# Altium PCB gprs1.PcbDoc (part 2 of 2)
Units mil, origin at the board's own origin, x right, y up, seen from the top; angles counter-clockwise.
Board outline 5204.72 x 2838.58 mil, 2 copper layers (Top Layer, Bottom Layer); 114 components, 66 nets, 333 pads, 440 vias.
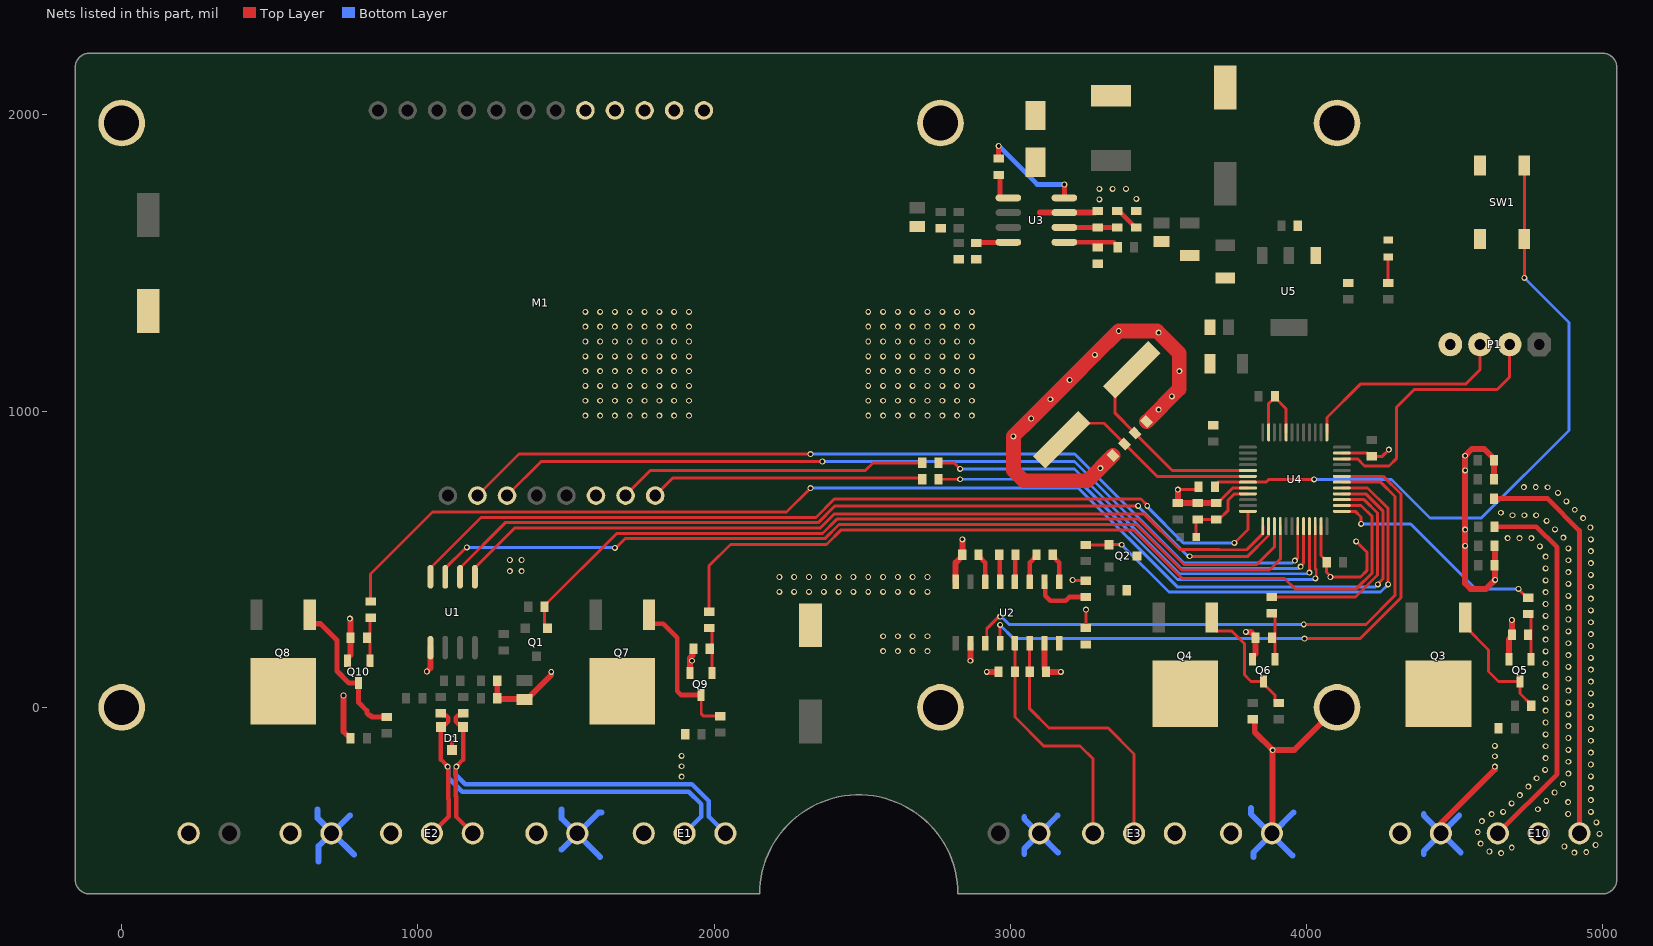
[diagram p2: the nets of this part, all layers, seen from the top]

## Via types
v1: diameter 20, hole 12, Top Layer to Bottom Layer, tented both sides, 334 vias
v2: diameter 20, hole 12, Top Layer to Bottom Layer, 106 vias

## Nets (pads, with @x,y where several pads share a name; then routed paths per layer and width w, separated by ;. In a path a pad name is that pad's centre, name@x,y a point inside that pad or via, vN(x,y) a via of type N, cw(c..) or ccw(c..) an arc to the next point about the centre after c; other vN are vias at no path point) (continued)
GND: C1.1 C2.1 C5.2 C6.2 C7.1 C8.1 C9.1 C11.2 C12.1 C13.1 C14.2 C15.1 C16.1 C17.1 C19.1 C20.1 C21.1 C22.1 C23.1 C24.1 C25.1 C26.1 C27.1 C28.1 C29.2 C30.1 C31.1 C32.1 C33.1 C34.1 C35.1 C36.1 C37.1 C38.1 C39.1 C40.1 C41.1 D1.3 D2.1 DS1.2 E1.A3 E2.A3 E3.A1 E4.A1 E5.A1 E6.A1 E7.A1 E8.A1 E9.A2 E10.A2 H1.1 H2.1 H3.1 H4.1 H5.1 H6.1 M1.6 M1.16 M1.17 M1.18 M1.19 M1.20 P1.4 Q5.2 Q6.2 Q9.2 Q10.2 R7.2 R15.2 R16.2 R24.2 R25.2 R28.2 R29.2 R30.2 R33.1 R34.1 SW1.1 SW1.2 U1.5 U2.8 U2.10 U2.15 U3.7 U4.8 U4.23 U4.35 U4.44 U4.47 U5.1 | length 8325.4
  Top Layer w10: v1(3210,430) 3211.22,428.78 3253.78,428.78 C5.2@3255,427.56 ; C9.1@3255,267.56 v1(3255,330) ; v1(3565,735) 3626.25,735 3635.03,743.78 C26.1@3635.03,745 ; C37.1@3695,689.29 3698.94,689.29 3750.12,740.47 U4.8@3801.54,740.47 ; U4.47@3871.42,928.46 3871.42,1024.92 C33.1@3892.56,1046.06 ; C33.1@3892.56,1050 C33.1@3892.56,1046.06 ; U4.44@3930.47,928.46 3930.47,1008.15 C33.1@3892.56,1046.06 ; U4.23@4048.58,611.54 4048.58,512.8 4067.44,493.94 C31.1@4067.44,490 4067.44,455.27 4080,442.71 v1(4080,440) 4181.56,440 4203,461.44 4203,524.02 v1(4167.02,560) ; U4.35@4118.46,858.58 4204.92,858.58 4216.06,847.44 C34.1@4220,847.44 4255,847.44 v1(4277.56,870)
  Top Layer w15: D1.3@1115,-144.37 v1(1115,-105)
  Top Layer w20: v1(748.66,40) 748.66,-81.22 C41.1@772.44,-105 ; Q10.2@762.6,157.4 762.6,166.26 772.44,176.1 R25.2@772.44,235 772.44,297.4 v1(770,299.84) ; v1(1030,121.08) 1042.09,133.17 U1.5@1042.09,201.73 ; C2.1@1267.56,90 R7.2@1267.56,30 1269.06,28.5 1358.5,28.5 C1.1@1360,27.01 1367.87,27.01 1450,109.13 v1(1450,120) ; Q9.2@1917.6,116.16 1917.6,166.83 1926.22,175.45 1926.22,194.55 R24.2@1930,198.33 ; U2.8@2815,423.35 2815,488.62 2837.44,511.06 C6.2@2837.44,515 v1(2837.44,566.75) ; v1(2865,157.4) U2.10@2865,216.65 ; v1(2920,120) C8.1@2959.88,120 ; 3100,1670 U3.7@3182.05,1670 3285.94,1670 3291.06,1675.12 C19.1@3295,1675.12 ; U2.15@3115,230.43 U2.15@3115,216.65 3115,129.06 3120.12,123.94 C7.1@3120.12,120 v1(3170,120) ; v1(3565,735) C35.1@3565,689.29 C36.1@3631.85,689.29 C37.1@3695,689.29 ; v1(3795,255) 3811.38,255 3827.44,238.94 R16.2@3827.44,235 3827.44,181.1 3817.6,171.26 Q6.2@3817.6,162.4 ; C39.1@3817.6,-40.04 3820.97,-40.04 3824.75,-43.82 3824.75,-83.82 v1(3885,-144.07) ; E5.A1@3882.8,-425 3885,-422.8 v1(3885,-144.07) ; H4.1@4102.36,0 3958.29,-144.07 v1(3885,-144.07) ; E4.A1@4452.8,-425 4452.8,-392.2 4635,-210 v1(4635,-200) ; C25.1@4632.5,769.76 R34.1@4632.5,834.76 4632.5,838.7 4599.2,872 4557.67,872 v1(4535,849.33) 4535,418.13 4553.13,400 4605.41,400 v1(4635.97,430.56) 4635.97,543.02 R33.1@4634,545 ; Q5.2@4682.6,162.4 4682.6,231.22 4692.44,241.06 R15.2@4692.44,245 v1(4692.44,295)
  Top Layer w50: C28.1@3346.29,850.51 3260.78,765 3045,765 3010,800 v1(3010,915) v1(3070,975) v1(3135,1040) v1(3200,1105) v1(3285,1190) v1(3365.44,1270.44) 3494.56,1270.44 v1(3500,1265) 3570,1195 v1(3570,1135) 3570,1075 C27.1@3459.49,964.49
  Bottom Layer w20: 661.61,-345 661.61,-374.23 E7.A1@710.09,-422.7 ; 665,-520 665,-467.8 E7.A1@707.8,-425 E7.A1@710.09,-422.7 ; 770,-365 E7.A1@711.19,-423.81 ; 785,-497.61 E7.A1@711.19,-423.81 ; 1485,-480 E6.A1@1537.5,-427.5 ; 1485,-345 1485,-375 E6.A1@1537.5,-427.5 ; 1615,-505 E6.A1@1537.5,-427.5 ; 1620,-355 1610,-355 E6.A1@1537.5,-427.5 ; 3046.59,-495 3046.59,-477.15 E8.A1@3096.87,-426.87 ; 3046.59,-370 3046.59,-376.59 E8.A1@3096.87,-426.87 ; 3158.74,-365 E8.A1@3096.87,-426.87 ; 3160,-490 E8.A1@3096.87,-426.87 ; 3811.52,-340 3811.52,-359.92 3879.7,-428.1 E5.A1@3880.8,-429.2 ; 3820,-505 3820,-490 E5.A1@3880.8,-429.2 ; E5.A1@3882.8,-425 E5.A1@3885,-425 ; 3951.6,-500 E5.A1@3880.8,-429.2 ; 3955,-355 E5.A1@3885,-425 ; 4395,-495 4395,-485 E4.A1@4455,-425 ; 4395,-360 4395,-365 E4.A1@4455,-425 ; 4515,-365 E4.A1@4455,-425 ; 4520,-490 E4.A1@4455,-425 ; E7.A1@710.09,-422.7 E7.A1@711.19,-423.81 ; E5.A1@3880.8,-429.2 E5.A1@3885,-425
  other v1: 1890,-233.64 1890,-198.64 4635,-165 1890,-163.64 4635,-130 1925,157.4 2570,190 2620,190 2670,190 2720,190 2570,240 2620,240 2670,240 2720,240 2220,390 2270,390 2320,390 2370,390 2420,390 2470,390 2520,390 2570,390 2620,390 2670,390 2720,390 2220,440 2270,440 2320,440 2370,440 2420,440 2470,440 2520,440 2570,440 2620,440 2670,440 2720,440 1310,460 1350,460 1310,497.5 1350,497.5 4535,545 4535,600 4535,800 3303.54,807.76 1565,985 1615,985 1665,985 1715,985 1765,985 1815,985 1865,985 1915,985 2520,985 2570,985 2620,985 2670,985 2720,985 2770,985 2820,985 2870,985 3500,1005 1565,1035 1615,1035 1665,1035 1715,1035 1765,1035 1815,1035 1865,1035 1915,1035 2520,1035 2570,1035 2620,1035 2670,1035 2720,1035 2770,1035 2820,1035 2870,1035 3545,1050 1565,1085 1615,1085 1665,1085 1715,1085 1765,1085 1815,1085 1865,1085 1915,1085 2520,1085 2570,1085 2620,1085 2670,1085 2720,1085 2770,1085 2820,1085 2870,1085 1565,1135 1615,1135 1665,1135 1715,1135 1765,1135 1815,1135 1865,1135 1915,1135 2520,1135 2570,1135 2620,1135 2670,1135 2720,1135 2770,1135 2820,1135 2870,1135 1565,1185 1615,1185 1665,1185 1715,1185 1765,1185 1815,1185 1865,1185 1915,1185 2520,1185 2570,1185 2620,1185 2670,1185 2720,1185 2770,1185 2820,1185 2870,1185 1565,1235 1615,1235 1665,1235 1715,1235 1765,1235 1815,1235 1865,1235 1915,1235 2520,1235 2570,1235 2620,1235 2670,1235 2720,1235 2770,1235 2820,1235 2870,1235 1565,1285 1615,1285 1665,1285 1715,1285 1765,1285 1815,1285 1865,1285 1915,1285 2520,1285 2570,1285 2620,1285 2670,1285 2720,1285 2770,1285 2820,1285 2870,1285 1565,1335 1615,1335 1665,1335 1715,1335 1765,1335 1815,1335 1865,1335 1915,1335 2520,1335 2570,1335 2620,1335 2670,1335 2720,1335 2770,1335 2820,1335 2870,1335 3300,1715 3425,1716.2 3300,1750 3345,1750 3390.12,1750
  other v2: 4656.52,-491.73 4903.58,-490.56 4943.54,-488.73 4616.85,-486.58 4692.17,-473.6 4869.52,-469.59 4975.47,-464.63 4586.99,-459.97 4988.31,-426.75 4577.28,-421.16 4977.56,-388.22 4591.38,-383.73 4623.96,-360.52 4882.18,-359.99 4663.15,-352.52 4959.01,-352.79 4780.38,-343.95 4691.44,-324.24 4882.18,-319.99 4808.67,-315.66 4959.01,-312.79 4719.72,-295.95 4836.95,-287.38 4959.01,-272.79 4748.01,-267.67 4865.24,-259.09 4776.29,-239.38 4959.01,-232.79 4883.42,-223.46 4804.57,-211.1 4959.01,-192.79 4883.42,-183.46 4806.58,-171.15 4959.01,-152.79 4883.42,-143.46 4806.58,-131.15 4959.01,-112.79 4883.42,-103.46 4806.58,-91.15 4959.01,-72.79 4883.42,-63.46 4806.58,-51.15 4959.01,-32.79 4883.42,-23.46 4806.58,-11.15 4959.01,7.21 4883.42,16.54 4806.58,28.85 4959.01,47.21 4883.42,56.54 4806.58,68.85 4959.01,87.21 4883.42,96.54 4806.58,108.85 4959.01,127.21 4883.42,136.54 4806.58,148.85 4959.01,167.21 4883.42,176.54 4806.58,188.85 4959.01,207.21 4883.42,216.54 4806.58,228.85 4959.01,247.21 4883.42,256.54 4806.58,268.85 4959.01,287.21 4883.42,296.54 4806.58,308.85 4959.01,327.21 4883.42,336.54 4806.58,348.85 4959.01,367.21 4883.42,376.54 4806.58,388.85 4959.01,407.21 4883.42,416.54 4806.58,428.85 4959.01,447.21 4883.42,456.54 4806.58,468.85 4959.01,487.21 4883.42,496.54 4806.58,508.85 4959.01,527.21 4883.42,536.54 4786.84,543.64 4959.01,567.21 4678.22,571.58 4718.22,571.58 4758.22,571.58 4866.4,572.74 4838.11,601.02 4957.41,607.18 4809.83,629.3 4933.03,638.89 4694.69,648.42 4734.69,648.42 4774.69,648.42 4655.61,656.94 4904.75,667.18 4876.46,695.46 4848.18,723.75 4733.19,743.18 4773.19,743.18 4813.19,743.13
GPRS_GPIO1: M1.2 U4.19 | length 3093.3
  Top Layer w10: M1.2@1200.83,715 1340.83,855 v1(2325,855) ; v1(3959.8,495.2) 3969.84,505.24 U4.19@3969.84,611.54
  Bottom Layer w10: v1(2325,855) 3216.82,855 3584.82,487 3951.6,487 v1(3959.8,495.2)
GPRS_GPIO2: M1.3 U4.20 | length 3018.8
  Top Layer w10: M1.3@1300.83,715 1415.83,830 v1(2365,830) ; v1(3979.6,475.4) 3989.53,485.33 U4.20@3989.53,611.54
  Bottom Layer w10: v1(2365,830) 3216.37,830 3577.37,469 3973.2,469 v1(3979.6,475.4)
GPRS_RXD: M1.7 R12.1 | length 1047.7
  Top Layer w10: M1.7@1700.83,715 1700.83,715.83 1785,800 2510.96,800 2535.96,825 R12.1@2702.44,825
GPRS_TXD: M1.8 R17.1 | length 928.8
  Top Layer w10: M1.8@1800.83,715 1860.83,775 2696.86,775 R17.1@2702.44,769.42
NetC3_1: C3.1 U2.1 | length 100.9
  Top Layer w16: C3.1@3142.56,515 3142.56,511.06 3165,488.62 U2.1@3165,423.35
NetC3_2: C3.2 U2.3 | length 100.9
  Top Layer w16: U2.3@3065,423.35 3065,488.62 3087.44,511.06 C3.2@3087.44,515
NetC4_1: C4.1 U2.5 | length 92.7
  Top Layer w16: C4.1@2962.44,515 2963.72,513.72 2963.72,424.63 U2.5@2965,423.35
NetC4_2: C4.2 U2.4 | length 92.7
  Top Layer w16: U2.4@3015,423.35 3016.28,424.63 3016.28,513.72 C4.2@3017.56,515
NetC5_1: C5.1 U2.2 | length 196.8
  Top Layer w16: U2.2@3115,423.35 3117.83,420.52 3117.83,377.17 3135,360 3186.81,360 3199.25,372.44 C5.1@3255,372.44
NetC6_1: C6.1 U2.6 | length 100.9
  Top Layer w16: C6.1@2892.56,515 2892.56,511.06 2915,488.62 U2.6@2915,423.35
NetC7_2: C7.2 E3.A2 U2.14 | length 904.7
  Top Layer w10: U2.14@3065,216.65 C7.2@3065,120 3065,-5 3130,-70 3330,-70 3417.2,-157.2 E3.A2@3417.2,-425
NetC8_2: C8.2 E3.A3 U2.13 | length 823
  Top Layer w10: U2.13@3015,216.65 C8.2@3015,120 3015,-32.56 3112.44,-130 3235,-130 3279.41,-174.41 E3.A3@3279.41,-425
NetC10_1: C10.1 U3.1 | length 105.6
  Top Layer w16: C10.1@2960,1797.44 2964.79,1792.65 2964.79,1723.52 2968.31,1720 U3.1@2993.07,1720
NetC10_2: C10.2 D2.2 L1.1 U3.8 | length 363.3
  Top Layer w16: C10.2@2960,1852.56 v1(2960,1895) ; U3.8@3182.05,1720 v1(3182.05,1765)
  Bottom Layer w16: v1(2960,1895) 3090,1765 v1(3182.05,1765)
NetC15_2: C15.2 U3.4 | length 109.1
  Top Layer w16: C15.2@2885,1567.56 2886.22,1568.78 2991.85,1568.78 U3.4@2993.07,1570
NetC18_1: C18.1 R30.1 | length 87.8
  Top Layer w16: C18.1@3360,1675.12 3365.78,1669.34 3371.72,1669.34 3421.06,1620 R30.1@3425,1620
NetC18_2: C18.2 C19.2 U3.6 | length 178
  Top Layer w16: U3.6@3182.05,1620 C19.2@3295,1620 C18.2@3360,1620
NetC26_2: C26.2 SW1.3 SW1.4 U4.7 | length 2339.7
  Top Layer w10: C26.2@3690.15,745 3690.15,748.94 3701.37,760.16 U4.7@3801.54,760.16 3862.45,760.16 3871.72,769.42 v1(4025,769.42) ; v1(4734.8,1449.76) SW1.4@4734.8,1580.98 SW1.3@4734.8,1829.02
  Bottom Layer w10: v1(4025,769.42) 4285.91,769.42 4415.84,639.5 4589.53,639.5 4885,934.97 4885,1299.57 v1(4734.8,1449.76)
NetC36_2: C36.2 C37.2 FB1.2 U4.9 | length 292.1
  Top Layer w10: FB1.2@3626.57,575 3626.57,628.9 C36.2@3631.85,634.17 3691.57,634.17 3704.17,634.17 3735,665 3735,699.76 3756.02,720.79 U4.9@3801.54,720.79 ; C37.2@3691.57,630.75 C37.2@3695,634.17
NetDS1_1: DS1.1 R35.1 | length 87.4
  Top Layer w10: R35.1@4275,1432.56 DS1.1@4275,1520
NetE4_A2: E4.A2 Q3.3
NetE5_A2: E5.A2 Q4.3
NetE6_A2: E6.A2 Q7.3
NetE7_A2: E7.A2 Q8.3
NetE10_A1: E10.A1 R32.2 | length 1354.7
  Top Layer w16: R32.2@4632.5,704.76 4812.83,704.76 4920.59,597.01 E10.A1@4920.59,-425
NetE10_A3: E10.A3 R31.2 | length 1287.7
  Top Layer w16: R31.2@4634,610 4774.8,610 4845,539.8 4845,-225 E10.A3@4645,-425
NetQ3_1: Q3.1 Q5.3 R10.2 | length 433.3
  Top Layer w10: Q3.1@4535,303.39 4535,273.07 4614,194.08 4614,121 4647.4,87.6 Q5.3@4720,87.6 4720,46.9 4757.96,8.94 R10.2@4757.96,5
NetQ4_1: Q4.1 Q6.3 R11.2 | length 439.2
  Top Layer w10: Q4.1@3680,303.39 3680,273.07 3695.87,257.2 3747.84,257.2 3790,215.04 3790,110 3812.4,87.6 Q6.3@3855,87.6 3855,78.74 3892.28,41.46 3892.28,23.85 3901.06,15.07 R11.2@3905,15.07
NetQ5_1: Q5.1 R13.2 R15.1 | length 157.3
  Top Layer w10: R13.2@4747.56,315 4748.62,315 4757.4,306.22 Q5.1@4757.4,162.4
NetQ6_1: Q6.1 R14.2 R16.1 | length 159.5
  Top Layer w10: R14.2@3882.8,317.44 3883.62,317.44 3892.4,308.66 Q6.1@3892.4,162.4
NetQ7_1: Q7.1 Q9.3 R18.2 | length 511.1
  Top Layer w10: Q9.3@1955,41.36 1956.28,40.08 1956.28,-22.36 1957.56,-23.64 1963.76,-29.84 R18.2@2020,-29.84
  Top Layer w16: Q7.1@1780.16,282.27 1827.73,282.27 1875,235 1875,55.08 1888.72,41.36 Q9.3@1955,41.36
NetQ8_1: Q8.1 Q10.3 R19.2 | length 494.5
  Top Layer w17: Q8.1@635.16,282.27 670.83,282.27 726.5,226.59 726.5,122.57 766.47,82.6 Q10.3@800,82.6 800,16.5 827.56,-11.06 827.56,-15 827.56,-18.94 836.34,-27.72 840.28,-27.72 845,-32.44 R19.2@895,-32.44
NetQ9_1: Q9.1 R22.2 R24.1 | length 156
  Top Layer w10: R22.2@1982.56,267.44 1983.62,267.44 1992.4,258.66 Q9.1@1992.4,116.16
NetQ10_1: Q10.1 R23.2 R25.1 | length 146.1
  Top Layer w10: Q10.1@837.4,157.4 837.4,299.84 R23.2@840,302.44
NetR27_2: R27.2 R29.1 U3.5 | length 189.9
  Top Layer w16: U3.5@3182.05,1570 3348.94,1570 3362.44,1556.5 R27.2@3362.44,1552.56
OSCIN: C27.2 U4.5 X1.1 | length 698.6
  Top Layer w10: X1.1@3409.06,1140 3353.38,1084.32 3353.38,992.65 C27.2@3420.51,925.51 3546.5,799.53 U4.5@3801.54,799.53
OSCOUT: C28.2 U4.6 X1.2 | length 726.4
  Top Layer w10: X1.2@3172.42,903.37 3228.1,959.05 3315.71,959.05 C28.2@3385.27,889.49 3494.91,779.84 U4.6@3801.54,779.84
POWSW_1: R13.1 U4.25 | length 764.3
  Top Layer w10: U4.25@4118.46,661.73 4164.27,661.73 4183.58,642.42 v1(4183.58,619.12) ; v1(4715,400) 4715,398.74 4743.62,370.12 R13.1@4747.56,370.12
  Bottom Layer w10: v1(4183.58,619.12) 4350.88,619.12 4570,400 v1(4715,400)
POWSW_2: R22.1 U4.26 | length 2856.9
  Top Layer w10: R22.1@1982.56,322.56 1982.56,477.75 2054.81,550 2379.36,550 2428.65,599.29 3415.71,599.29 3580,435 3925.42,435 3960.42,400 4167.02,400 4221,453.98 4221,644 4183.58,681.42 U4.26@4118.46,681.42
POWSW_3: R14.1 U4.27 | length 735.5
  Top Layer w10: R14.1@3882.8,372.56 4165.03,372.56 4239,446.53 4239,656 4193.9,701.1 U4.27@4118.46,701.1
POWSW_4: R23.1 U4.28 | length 4171.8
  Top Layer w10: R23.1@840,357.56 840,450.4 1048.92,659.32 2244.32,659.32 v1(2325,740) ; U4.28@4118.46,720.79 4199.67,720.79 4257,663.46 4257,433.36 4240,416.36 v1(4240,415)
  Bottom Layer w10: v1(2325,740) 3230,740 3563,407 4232,407 v1(4240,415)
R\S\2\3\2\_\E\N\: Q2.1 R9.2 U4.29 | length 1538.6
  Top Layer w10: R9.2@3255,548.62 3332.6,548.62 Q2.1@3332.76,548.46 3333.32,549.02 v1(3375,549.02) ; U4.29@4118.46,740.47 4205.44,740.47 4275,670.91 v1(4275,415)
  Bottom Layer w10: v1(3375,549.02) 3535.02,389 4249,389 v1(4275,415)
R\S\4\8\5\_\E\N\: Q1.1 R5.2 U4.15 | length 2822.9
  Top Layer w10: Q1.1@1437.4,267.24 1427.56,277.09 R5.2@1427.56,340.12 1427.56,344.06 1670.83,587.32 2365.77,587.32 2413.74,635.29 3432.18,635.29 3585.47,482 3831.06,482 3891.1,542.05 U4.15@3891.1,611.54
RS232_3V3: C9.2 Q2.3 R8.2 U2.16
RS232_DIN: U2.11 U4.30 | length 2031.1
  Top Layer w10: U2.11@2915,216.65 2920,221.65 2920,265.75 2955.47,301.22 2957.29,301.22 2962.29,306.22 v1(2965,306.22) ; v1(3990,280) 4200,280 4298.29,378.29 4298.29,711.71 4249.84,760.16 U4.30@4118.46,760.16
  Bottom Layer w10: v1(2965,306.22) 2967.71,306.22 2972.71,301.22 2974.53,301.22 2995.75,280 v1(3990,280)
RS232_ROUT: U2.12 U4.31 | length 2065
  Top Layer w10: U2.12@2965,216.65 v1(2965,278.22) ; v1(3992.58,232) 4179.84,232 4317.98,370.14 4317.98,719.86 4258,779.84 U4.31@4118.46,779.84
  Bottom Layer w10: v1(2965,278.22) 3011.22,232 v1(3992.58,232)
RS485_DE: U1.3 U4.16 | length 3099.3
  Top Layer w10: U1.3@1092.09,440.71 1092.09,469.21 1162.88,540 v1(1165,540) ; v1(1665,538.47) 1668.47,538.47 1699.32,569.32 2373.23,569.32 2421.2,617.29 3424.73,617.29 3578.02,464 3874,464 3910.79,500.79 U4.16@3910.79,611.54
  Bottom Layer w10: v1(1165,540) 1165.77,539.23 1664.23,539.23 v1(1665,538.47)
RS485_DI: U1.4 U4.12 | length 3030.5
  Top Layer w10: U1.4@1042.09,440.71 1042.09,470.71 1212.7,641.32 2343.41,641.32 2405.41,703.33 3440.68,703.33 3461.71,682.31 v1(3461.71,680) ; v1(3756.02,555) 3801.54,600.51 U4.12@3801.54,661.73
  Bottom Layer w10: v1(3461.71,680) 3461.71,676.83 3583.54,555 v1(3756.02,555)
RS485_N: D1.1 E1.A1 E2.A1 R6.1 | length 1520.8
  Top Layer w15: R6.1@1152.4,-19.96 1146.12,-26.24 1136.29,-26.24 1127.5,-35.03 1127.5,-47.61 1136.29,-56.4 1143.17,-56.4 D1.1@1152.4,-65.63 1152.4,-176.25 1130,-198.65 v1(1130,-200) 1130,-203.54 1127.5,-206.04 1127.5,-299.45 1128.6,-300.55 1128.6,-368.6 E2.A1@1185,-425
  Bottom Layer w15: v1(1130,-200) 1130,-203.54 1127.5,-206.04 1127.5,-227.14 1159.73,-259.38 1924.73,-259.38 1981.4,-316.04 1981.4,-368.6 E1.A1@2037.8,-425
RS485_P: D1.2 E1.A2 E2.A2 R2.1 | length 1520.8
  Top Layer w15: E2.A2@1047.2,-425 1103.6,-368.6 1103.6,-310.91 1102.5,-309.8 1102.5,-202.5 v1(1100,-200) 1100,-198.65 1077.6,-176.25 D1.2@1077.6,-65.63 1086.83,-56.4 1093.71,-56.4 1102.5,-47.61 1102.5,-35.03 1093.71,-26.24 1083.88,-26.24 R2.1@1077.6,-19.96
  Bottom Layer w15: v1(1100,-200) 1102.5,-202.5 1102.5,-237.5 1149.38,-284.38 1914.38,-284.38 1956.4,-326.4 1956.4,-368.6 E1.A2@1900,-425
RS485_R\E\: U1.2 U4.14 | length 2978.4
  Top Layer w10: U1.2@1142.09,440.71 1142.09,470.71 1294.7,623.32 2350.86,623.32 2407.87,680.33 v1(3431.15,680.33) ; v1(3605,510) 3801.13,510 3871.34,580.21 3871.34,611.46 U4.14@3871.42,611.54
  Bottom Layer w10: v1(3431.15,680.33) 3431.15,678.03 3599.18,510 v1(3605,510)
RS485_RO: U1.1 U4.13 | length 2863.4
  Top Layer w10: U1.1@1192.09,440.71 1192.09,470.71 1326.7,605.32 2358.32,605.32 2406.29,653.29 3450.17,653.29 3570.47,533 3705.58,533 3706.58,532 3797.63,532 3851.73,586.1 U4.13@3851.73,611.54
SWCLK: P1.3 U4.37 | length 718.5
  Top Layer w10: U4.37@4068.27,928.46 4068.27,978.27 4181,1091 4536,1091 4585,1140 P1.3@4585,1225
SWDIO: P1.2 U4.34 | length 911.8
  Top Layer w10: U4.34@4118.46,838.9 4171.1,838.9 4195,815 4277.56,815 4303.62,841.06 4303.62,1013.62 4363,1073 4643,1073 4685,1115 P1.2@4685,1225
USART3_RX: R17.2 U4.22 | length 1592.1
  Top Layer w10: R17.2@2757.56,769.42 2758.14,770 v1(2830,770) ; U4.22@4028.9,611.54 4028.9,467.84 4032.21,464.53 4032.21,438.4 v1(4029.01,435.2)
  Bottom Layer w10: v1(2830,770) 3225.46,770 3563.46,432 4025.81,432 v1(4029.01,435.2)
USART3_TX: R12.2 U4.21 | length 1564.8
  Top Layer w10: R12.2@2757.56,825 2810,825 v1(2830,805) ; v1(4009.21,455) U4.21@4009.21,611.54
  Bottom Layer w10: v1(2830,805) 3215.91,805 3569.91,451 4005.21,451 v1(4009.21,455)
pads on no net: M1.4 M1.5 M1.13 M1.14 M1.15 U2.7 U2.9 U4.2 U4.3 U4.4 U4.17 U4.18 U4.32 U4.33 U4.38 U4.39 U4.40 U4.41 U4.42 U4.43 U4.45 U4.46

## Polygon pours and split planes (outlines as drawn)
GND on Bottom Layer "Top Layer-No Net" (solid, remove dead copper, pour order 0): -220,-690 -245,-665 -245,2285 5080,2285 5255,2110 5255,-675 165,-675 95,-745
GND on Top Layer "Top Layer-No Net" (solid, remove dead copper, pour order 6): 2785,503.74 2785,246.65 2815,216.65 2965,216.65 2959.88,211.54 2959.88,-63.66 3186.81,-290.59 3186.81,-441.81 3290,-545 3575,-545 3645,-475 3635,-465 3635,-310 3365,-40 3278.74,-40 3223.71,15.03 3223.71,504.65
GND on Top Layer "Top Layer-No Net" (solid, remove dead copper, pour order 4): 4357.12,582.88 4357.12,995.1 4397.12,1035.1 4837.12,1035.1 5012.12,860.1 5012.12,-519.9 4957.12,-574.9 4627.31,-574.9 4567.12,-514.7 4567.12,-368.97 4792.12,-143.97 4792.12,390.1 4549.9,390.1
GND on Top Layer "Top Layer-No Net" (solid, remove dead copper, pour order 2): 1295,-495 1295,-320 1460,-155 1460,435 1560,535 1445,650 1095,650 915,470 915,17.18 975,-42.82 975,-130 845,-260 845,-495

## Keep-outs
Keep-Out Layer:
  lines w10: -157.48,-579.92 ccw(c-107.48,-579.92) -107.48,-629.92 2153.54,-629.92 cw(c2488.19,-629.92) 2822.83,-629.92 4997.24,-629.92 ccw(c4997.24,-579.92) 5047.24,-579.92 5047.24,-565 5047.24,2148.39 5047.24,2158.66 ccw(c4997.24,2158.66) 4997.24,2208.66 -95,2208.66 -107.48,2208.66 ccw(c-107.48,2158.66) -157.48,2158.66 -157.48,2155 -157.48,-535.38 -157.48,-579.92

## Other copper
Top Layer:
  region net 5V: 4570,925.51 4570,920 4510,860 4510,430 4430,350 4405,350 4405,890 4410,895
  region net 5V: 4432.74,880 4442.74,890 4873.45,890 4983.45,1000 4983.45,1070.03 4770.03,1070.03 4740,1040 4535,1040
  region net 5V: 4433.73,805 4433.73,223.73 4420,210 4343.94,210 4315,238.94 4315,330 4360,375 4360,825
  region net 12V: 315,-475 315,112.44 195,232.44 195,286.04 394.82,286.04 410,301.22 453.95,257.27 394.82,198.15 394.82,-204.82 455,-265 455,-500 430,-525 365,-525
  region net GND: -30,655 -30,-280 45,-355 155,-465 260,-465 290,-435 290,96.22 175,211.22 175,480 230,535 695,535 815,655
  region net GND: 2288.85,1415 55,1415 -30,1330 -30,655 815,655 1088.46,928.46 2267.31,928.46
  region net 12V: 523.6,241.04 550,267.44 550,365 480,435 235,435 195,395 195,286.04 240,241.04
  region net 12V: 3477.5,355 3255,132.5 3255,14.41 3304.41,-35 3425,-35 3450,-10 3450,180 3475,205 3558.24,205 3558.24,322.82 3526.07,355
  region: 3477.5,355
  region net NetE6_A2: 1315,-450.05 1315,-151.74 1537.8,71.05 1537.8,174.53 1568.27,205 1790,205 1820,175 1820,-85.83 1631.44,-274.38 1520.62,-274.38 1455,-340 1455,-446.26 1420,-481.26 1345,-481.26
  region net NetE4_A2: 4235,-485 4180,-430 4180,-153.78 4280,-53.78 4280,139.52 4324.22,183.74 4541.26,183.74 4565,160 4565,-165 4375,-355 4375,-455 4345,-485
  region net NetE5_A2: 3670,-485 3645,-460 3645,-376.06 3465,-196.06 3465,165 3490,190 3715,190 3745,160 3745,-82.82 3817.6,-155.41 3817.6,-447.4 3780,-485
  region net NetE7_A2: 415,172.76 415,-186.26 490,-261.26 490,-480 535,-525 600,-525 640,-485 640,-125 675,-90 675,167.44 644.11,198.33 440,198.33
  region net 5V: 4335,805 4335,1011.06 4383.94,1060 4560,1060 4560,980 4433.73,853.73 4433.73,805
  region net 5V: 4741.3,1058.45 4860,1177.14 4860,1435 4815.26,1479.74 4815.26,1840.26 4870,1895 4940,1895 4983.45,1851.55 4983.45,1070.03 4933.42,1020 4423.79,1020 4437.64,1058.45
  region net GND: 2770,170 2888.53,170 2935,123.53 2935,55 2909.84,55 2890,35.16
  region net GND: 2130,129.06 2130.94,130 2515,130 2729.96,-84.96 2903.68,-84.96 2935,-53.64 2935,71.04 2888.96,71.04 2755,205 2755,455 2684.81,525.19 2416.68,525.19 2383.5,492 2192,492 2055,355 2055,205.94
  region net GND: 1855,-70 1925,-70 1925,-263.64 1910,-278.64 1870,-278.64 1855,-263.64
  region net GND: 4600,27.01 4622.99,50 4648.96,50 4670,28.96 4670,-230 4655,-245 4615,-245 4600,-230
  region net GND: 3815,1910 3529.88,1910 3465,1974.88 3465,2075 3417.2,2122.8 3097.8,2122.8 3097.8,2190 4310,2190 4505,1995
  region net GND: 3097.8,2122.8
  region net GND: 3055,1535 3055,1747.56 2993.07,1809.49 2993.07,1896.81 2920,1969.88 2920,2160 2950,2190 3097.8,2190 3097.8,2122.8 3030,2055 3030,1945 3060,1915 3110,1915 3130,1895 3130,1759.88 3120.12,1750 3120.12,1545
  region net GND: 4070,1120
  region net GND: 3871.42,990 4042.24,990 4167.24,1115 4440,1115 4485,1160 4485,1225 4644.8,1384.8 4644.8,1855.2 4505,1995 4325,1995 4285,1955 4285,1595 4370,1510 4370,1300 4255,1185 3976.34,1185 3871.34,1080
  region net GND: 3110,1565 3155,1520 3454,1520 3475,1541 3475,1585 3490,1600 3531.5,1600 3581.5,1550 3655,1550 3725,1480 3755,1480 3783.74,1451.26 3783.74,1423.74 3700,1340 3700,1245 3740,1205 3740,963.46 3705,928.46 3703.46,930 3626.57,1006.89 3626.57,1211.54 3508.12,1330 3350,1330 2948.46,928.46 2123.46,928.46 2155,960 2155,1110
  region net GND: 3105,1580
  region net GND: 3097.8,1552.56
  region net GND: 3815,1910 3950.16,1774.84 3950.16,1614.84 4000,1565 4000,1473.58 4063.58,1410 4185,1410 4221,1446 4221,1531 4245,1555 4290,1555 4325,1555 4325,1995 4150,2170 3785,2170
  region net GND: 2145,1415 2435,1415 2660,1640 2720,1640 2730,1630 2780,1630 2780,1553.43 2808.43,1525 3030,1525 3065,1560 3110,1515 3125,1515 3125,1460 2735,1070 2265,1070
  region net GND: 3213.94,1662.4 3243.94,1692.4 3243.94,1740 3273.94,1770 3428.94,1770 3465,1733.94 3465,1666.06 3453.94,1655 3409.06,1655 3395,1669.05 3395,1695.12 3385.12,1705 3340,1705 3328.94,1693.94 3328.94,1670 3308.94,1650 3226.34,1650
  region net GND: 3195,1670
  region: 4680.83,-47.4
  region net 12V: 2130,87.6 2493.37,87.6 2720.96,-140 2930,-140 3025,-235 3025,-505 2985,-545 2892.56,-545 2892.56,-452.56 2680,-240 2250,-240 2130,-120
  region: 1945,-70
  region net RS232_3V3: 3172.42,240 3275,240 3375,340 3375,500.22 3405,530.22 3439.94,530.22 3450,520.16 3450,345.53 3296.91,192.44 3170,192.44
  region: 1259.17,225.83
  region net 3V3: 1250,235 1250,320 1275,345 1345,345 1371.52,371.52 1393.48,371.52 1400,365 1400,251.69 1364.96,216.65 1268.35,216.65
  region net 3V3_485: 1183.3,71.04 1183.3,232.33 1192.01,241.04 1202.01,231.04 1234.92,231.04 1259.92,206.04 1400.31,206.04 1415.75,190.61 1415.75,101.87 1384.92,71.04 1312.24,71.04 1300.75,82.54 1300.75,106.38 1285,122.13 1256,122.13 1239.92,106.04 1239.92,76.04 1229.92,66.04 1188.3,66.04
  region net NetC10_2: 3145,1720 3145,1905 3100,1950 3050,1950 3050,2045 3105,2100 3415,2100 3445,2070 3445,1975 3380,1910 3250,1910 3215,1875 3215,1720
  region net 3V3: 3989.53,1400 4310,1400 4325,1385 4325,1287.5 4237.5,1200 3923.23,1200
  region net 3V3: 3995,1390
  region: 4030.55,1385
  region net 3V3: 3271.38,464.68 3305,431.06 3305,386.06 3320,371.06 3350,371.06 3360,381.06 3360,501.06 3340,521.06 3220,521.06 3205,506.06 3205,484.68 3225,464.68
  region net 3V3: 3853.09,1030 3853.09,929.82 3801.54,878.27 3671.73,878.27 3665,885 3665,895 3665,915 3717.5,915 3760,957.5 3760,1070.24
  region net 3V3: 3910.28,1417.44 3792.44,1417.44 3715,1340 3715,1250 3760,1205 3760,1070.24 3800.24,1030 3853.09,1030 3863.09,1040 3863.09,1108.09 4007.76,1252.76
  region net 12V: 2786.85,1855 2845,1855 2890,1810 2888.75,1808.75 2830,1808.75
  region net 12V: 2800,1810 2890,1810 2920,1780 2920,1699.47
  region net 12V: 1175,1955 1275,1855 2786.85,1855 2901.85,1740 2959.88,1681.97 2959.88,1660 2947.38,1647.5 2742.5,1647.5 2725,1665 2605,1665 2410,1470 1215,1470
  region net 12V: 10,1470 10,1750 275,2015 1170,2015 1215,1970 1215,1470
  region net 3V3: 3910.79,1552.56 3910.79,1463.23 3865,1417.44 3865,1268.62 3898.62,1235 3990,1235 4020,1265 4020,1382.4 3969.84,1432.56 3969.84,1565 3923.23,1565
  region net 5V: 3243.94,1885 3815,1885 3935,1765 3935,1605 3891.1,1561.1 3891.1,1475.87 3865,1449.76 3800.24,1449.76 3677.99,1572.01 3588.92,1572.01 3545.93,1615 3480,1615 3480,1745 3435,1790 3270,1790 3243.94,1816.06
  region: 3195,1720
  region: 3210,1775
  region: 827.56,-105
Bottom Layer:
  region net 12V: 405,-60 310,-60 -10,260 -10,1710 355,2075 765,2075 825,2015 1200,2015 1220,1995 1220,1075 695,550 695,-5 700,-5
  region net 12V: 2825,-150 2998.74,23.74 3158.74,23.74 3292.4,157.4 3422.6,157.4 3460,120 3460,-82.82 3240.15,-302.67 2990,-302.67
  region net 12V: 310,-489.72 310,103.74 381.26,175 575,175 575,-296.26 455,-416.26 455,-459.79 425,-489.79
  region: 295,-490
  region net 5V: 3490,1635 3565,1560 4740,1560 4885,1415 4948.68,1415 4985,1451.32 4985,1815 4860,1815 3530,1815 3490,1775
  region net 3V3: 3526.07,645 3526.07,640.31 3591.37,575 3969.6,575 3982.3,587.7 3811.52,758.48 3811.52,898.13
  region net 3V3: 3561.07,610
  region net GND: 1520,1965 2210,1965 2235,1940 2235,1040 2100,905 1615,905 1520,1000
  region net 3V3: 3015,453.5 3015.19,453.3 3325,453.3 3325,466.06 3330,471.06 3295,506.06 3067.57,506.06
  region net 3V3: 3615,900 3615,1120 3745,1250 3965,1250
  region net 12V: 1010,-95
  region net 12V: 535,-330.95 541.84,-330.95 757.8,-115 1030,-115 1060,-85 2010,-85 2165,-240 2645.25,-240 2905.25,-500 2977.01,-500 3020,-457.01 3020,-238.78 2920,-138.78 2908.78,-150 2705,-150 2475,80 1295,80 1230,15 735,15 575,175
  region net 12V: 595,-225
  region net 3V3: 4330,1160 4360,1130 4670,1130 4745,1205 4820,1205 4820,1215 4825,1220 4825,1078.81 4681.19,935 4245,935
  region net 3V3: 3780,785 3930,935 4245,935 4330,1020 4330,1160 4240,1250 4135,1250 4135,1235 3760,860
  region net 3V3: 3526.07,645 3561.07,610 3905,610 3800,715 3800,845 4135,1180 4135,1250 3965,1250 3615,900 3615,750

## Silkscreen, mask and mechanical layers (free items; w line width, h text height)
Top Overlay:
  text "RESET" at 4570,1915 h40
  text "G" at 4450,1305 h40
  text "CLK" at 4505,1305 h40
  text "IO" at 4635,1305 h40
  text "3V3" at 4715,1305 h40
  text "ADC_1" at 4570,-205 h40
  text "ADC_2" at 4805,-205 h40
  text "Pow_In" at 185,-210 h40
  text "+PowSW_1" at 485,-210 h40
  text "RS485_1" at 925,-210 h40
  text "PowSW_2" at 1340,-210 h40
  text "RS485_2" at 1777.8,-210 h40
  text "+Pow" at 2955,-210 h40
  text "RX" at 3245,-210 h40
  text "TX" at 3380,-210 h40
  text "+PowSW_3" at 3685,-210 h40
  text "+PowSW_4" at 4215,-210 h40
Mechanical 1:
  lines w10: -559.53,-372.95 cw(c-559.53,-660.35) -272.13,-660.35 2188.5,-660.35 cw(c2475.91,-660.35) 2763.31,-660.35 5082.2,-660.35 cw(c5369.61,-660.35) 5369.61,-372.95 5369.61,2343.58 cw(c5369.61,2630.98) 5082.2,2630.98 2763.31,2630.98 cw(c2475.91,2630.98) 2188.5,2630.98 -272.13,2630.98 cw(c-559.53,2630.98) -559.53,2343.58 -559.53,-372.95

## Dimensions
-157.48,-535.38 to 5047.24,-565 on Mechanical 1
-95,2208.66 to -107.48,-629.92 on Mechanical 1

## Text inside footprints (layer, text, board x,y; h text height)
FB1: Mechanical 6 "Land Pattern Adapted for Reflow Soldering" at 3560.63,598.62 h1.97
M1: Top Overlay "9" at 885.83,1880 h40 r90; Top Overlay "20" at 1985.83,1880 h40 r90; Top Overlay "8" at 1815.83,790 h40 r90; Top Overlay "1" at 1115.83,790 h40 r90